# EAGLE board 13573_SparkFun_Roshamglo-panel.v10 (EAGLE 7.5.0), part 1 of 2
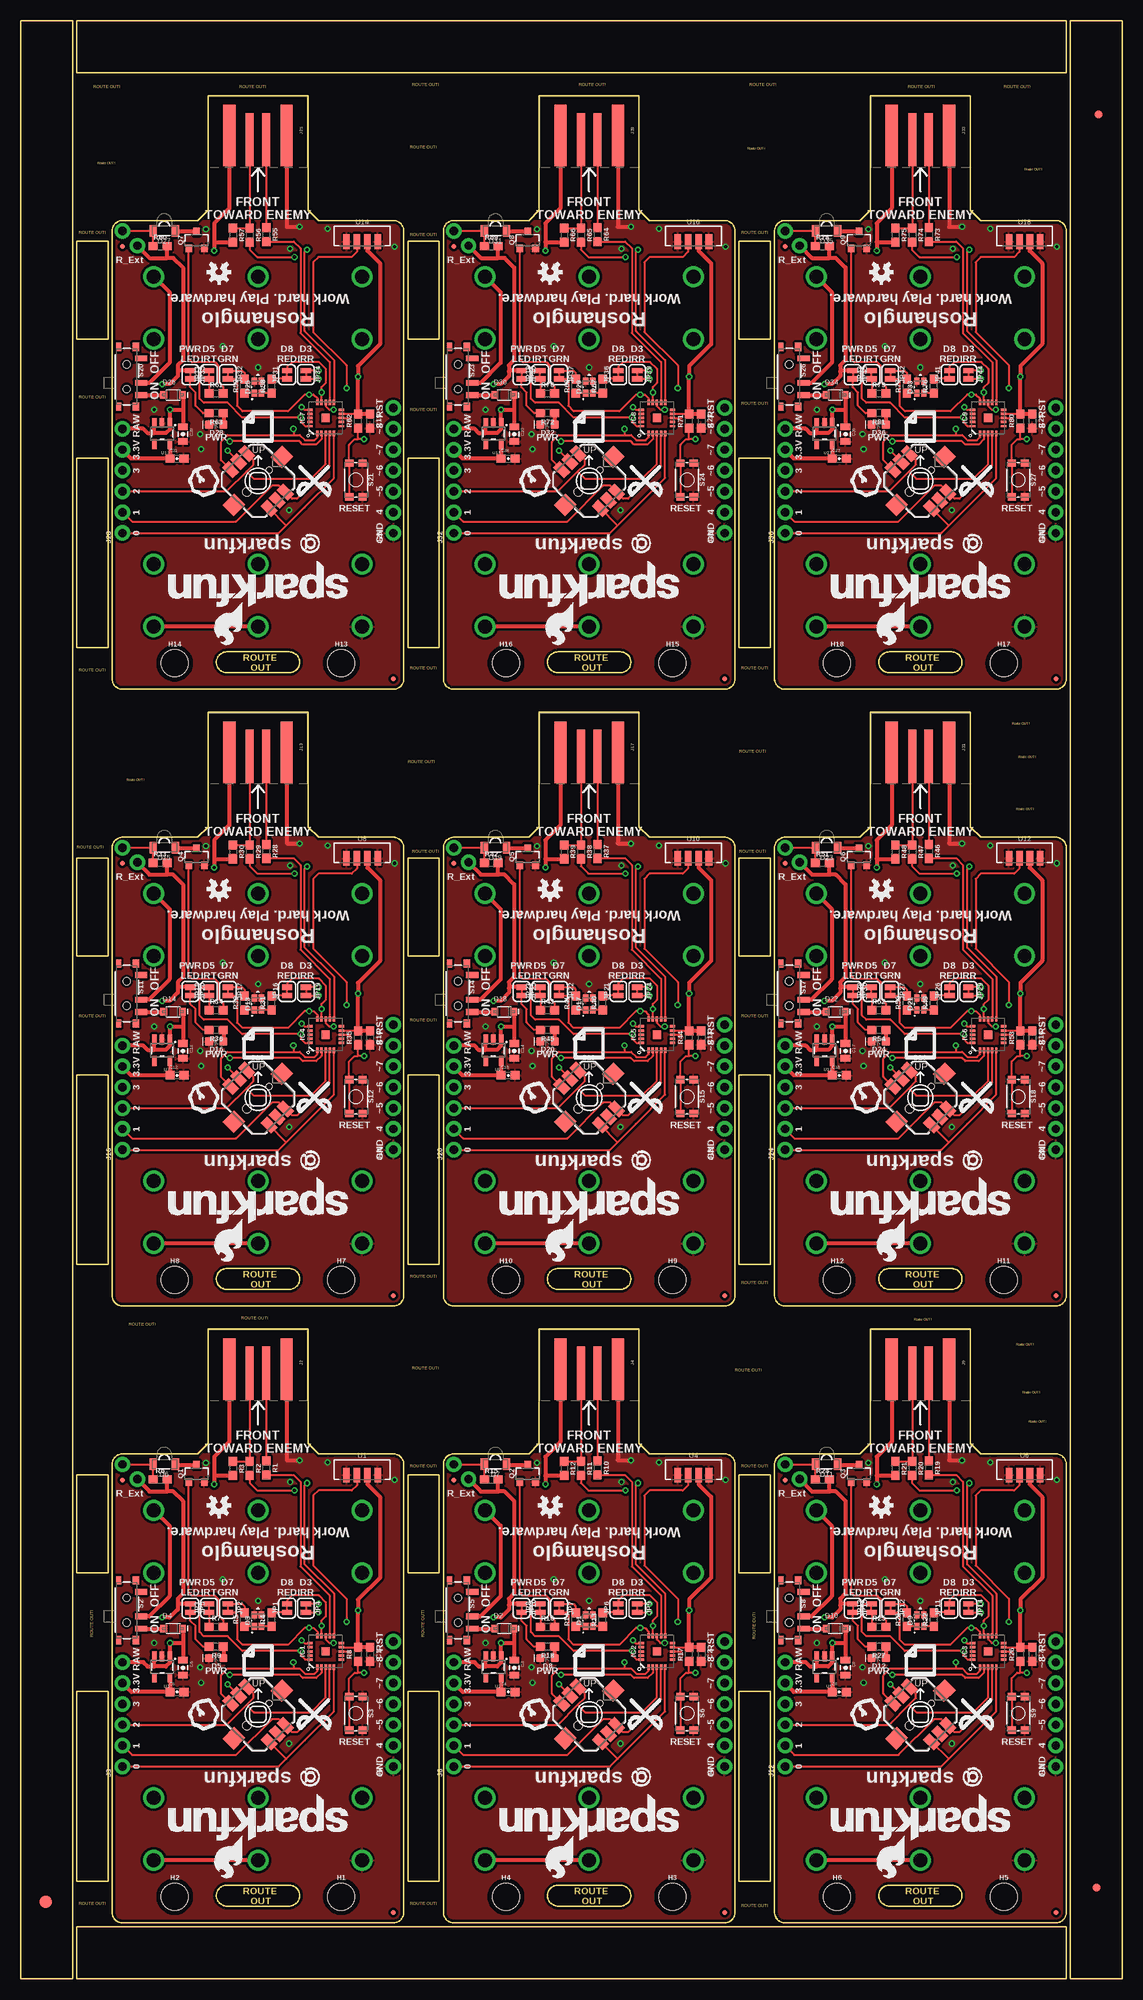
[diagram p0: board, top side]
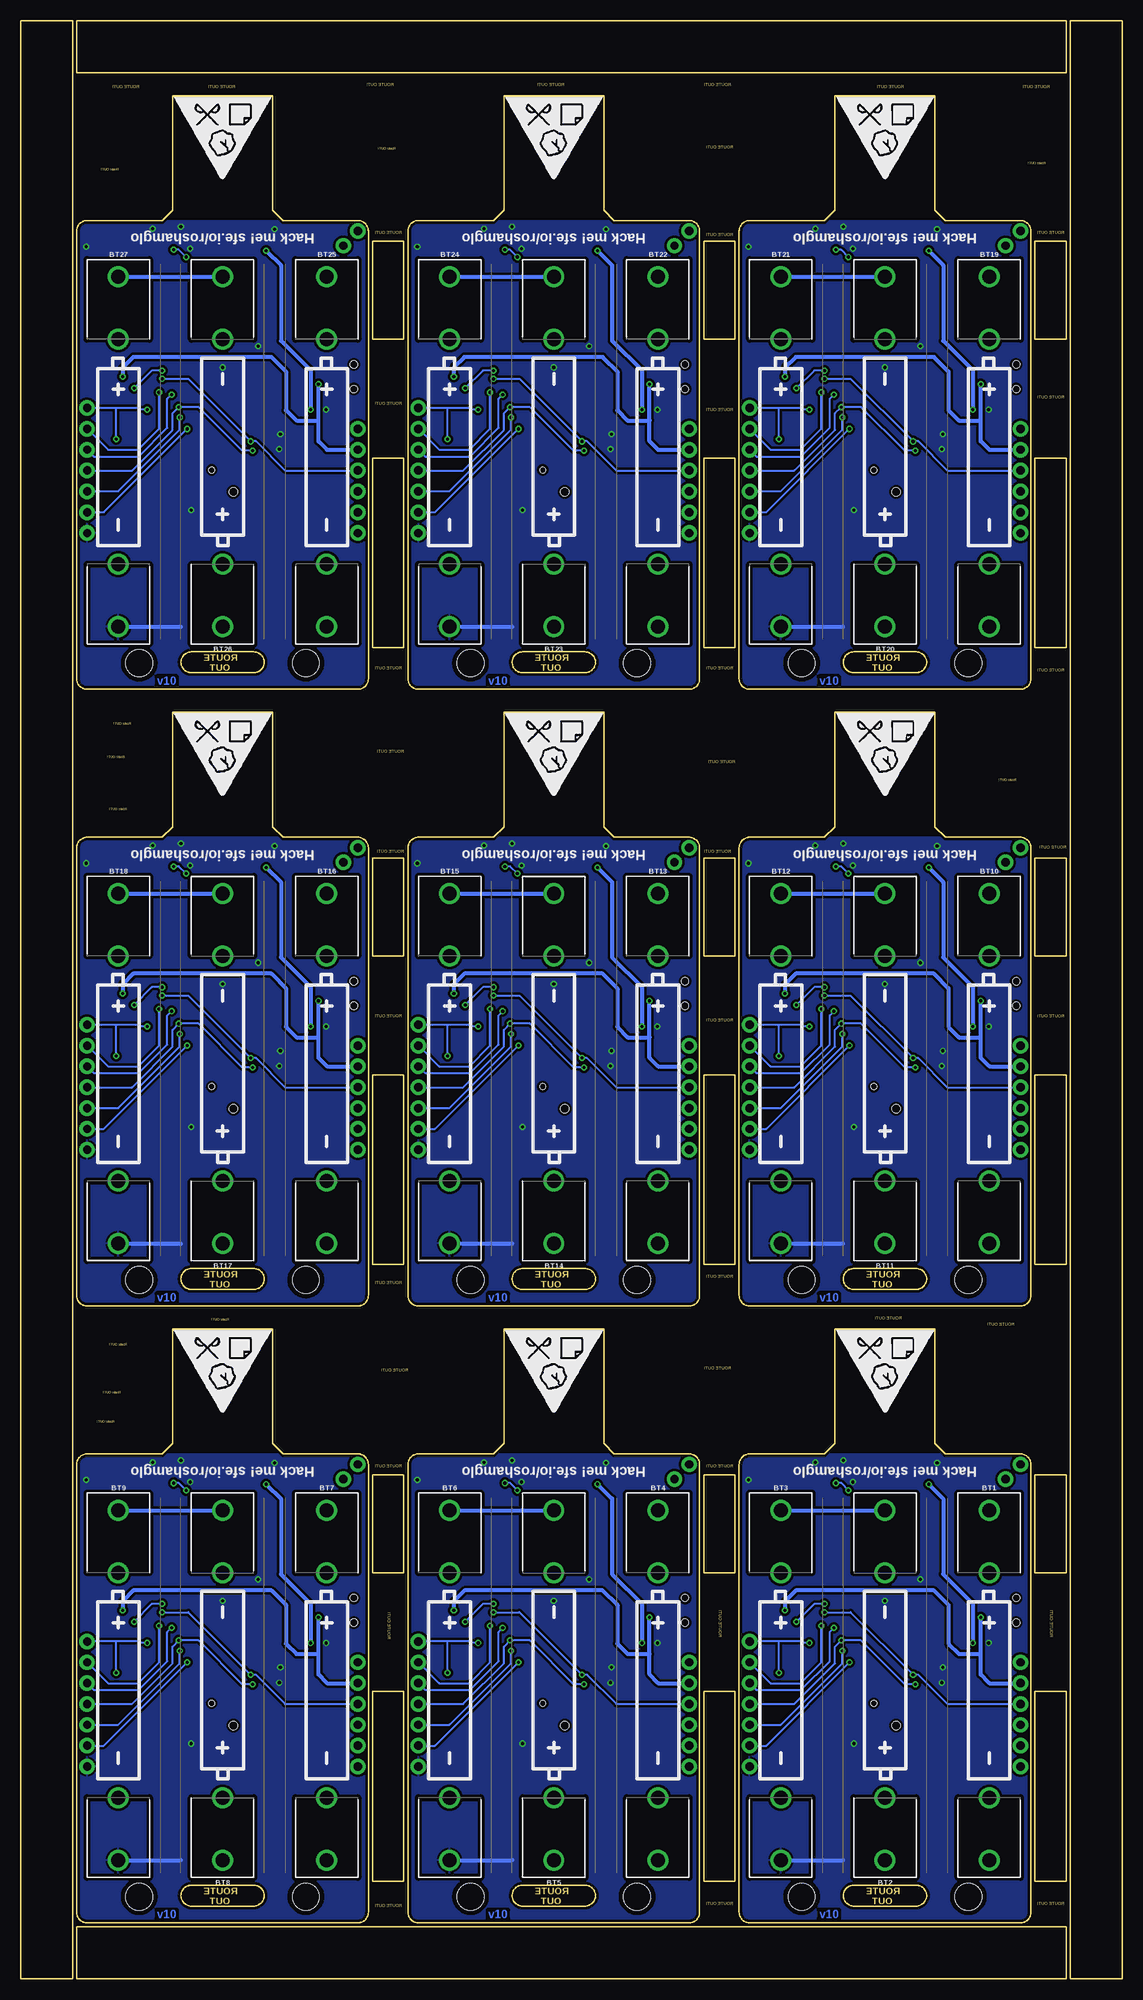
[diagram p1: board, bottom side, seen from below]

Size 134.37 x 238.76 mm. Coordinates in mm from the lower left corner, seen from the top.
Outline: 6.35,79.25 6.35,0 0,0 0,29.72
Outline: 0,27.18 0,238.76 6.35,238.76 6.35,76.71
Outline: 79.25,0 6.86,0 6.86,6.35 29.72,6.35
Outline: 27.18,6.35 127.51,6.35 127.51,0 76.71,0
Outline: 134.37,214.12 134.37,0 128.02,0 128.02,164.59
Outline: 128.02,162.05 128.02,238.76 134.37,238.76 134.37,211.58
Outline: 55.12,238.76 127.51,238.76 127.51,232.41 104.65,232.41
Outline: 107.19,232.41 6.86,232.41 6.86,238.76 57.66,238.76
Outline: 10.67,11.94 10.67,35.05 6.86,35.05 6.86,11.94 10.67,11.94
Outline: 10.67,49.53 10.67,61.47 6.86,61.47 6.86,49.53 10.67,49.53
Outline: 51.05,11.94 51.05,35.05 47.24,35.05 47.24,11.94 51.05,11.94
Outline: 51.05,49.53 51.05,61.47 47.24,61.47 47.24,49.53 51.05,49.53
Outline: 91.44,11.94 91.44,35.05 87.63,35.05 87.63,11.94 91.44,11.94
Outline: 91.44,49.53 91.44,61.47 87.63,61.47 87.63,49.53 91.44,49.53
Outline: 10.67,87.12 10.67,110.24 6.86,110.24 6.86,87.12 10.67,87.12
Outline: 10.67,124.71 10.67,136.65 6.86,136.65 6.86,124.71 10.67,124.71
Outline: 51.05,87.12 51.05,110.24 47.24,110.24 47.24,87.12 51.05,87.12
Outline: 51.05,124.71 51.05,136.65 47.24,136.65 47.24,124.71 51.05,124.71
Outline: 91.44,87.12 91.44,110.24 87.63,110.24 87.63,87.12 91.44,87.12
Outline: 91.44,124.71 91.44,136.65 87.63,136.65 87.63,124.71 91.44,124.71
Outline: 10.67,162.31 10.67,185.42 6.86,185.42 6.86,162.31 10.67,162.31
Outline: 10.67,199.9 10.67,211.84 6.86,211.84 6.86,199.9 10.67,199.9
Outline: 51.05,162.31 51.05,185.42 47.24,185.42 47.24,162.31 51.05,162.31
Outline: 51.05,199.9 51.05,211.84 47.24,211.84 47.24,199.9 51.05,199.9
Outline: 91.44,162.31 91.44,185.42 87.63,185.42 87.63,162.31 91.44,162.31
Outline: 91.44,199.9 91.44,211.84 87.63,211.84 87.63,199.9 91.44,199.9
Outline: 11.18,62.74 11.18,8.13 arc90 12.45,6.86 45.47,6.86 arc90 46.74,8.13 46.74,62.74 arc90 45.47,64.01 36.32,64.01 35.05,65.28 35.05,79.25 22.86,79.25 22.86,65.28 21.59,64.01 12.45,64.01 arc90 11.18,62.74
Outline: 32.77,8.89 25.15,8.89 arc-90 23.88,10.16 arc-90 25.15,11.43 32.77,11.43 arc-90 34.04,10.16 arc-90 32.77,8.89
Outline: 51.56,62.74 51.56,8.13 arc90 52.83,6.86 85.85,6.86 arc90 87.12,8.13 87.12,62.74 arc90 85.85,64.01 76.71,64.01 75.44,65.28 75.44,79.25 63.25,79.25 63.25,65.28 61.98,64.01 52.83,64.01 arc90 51.56,62.74
Outline: 73.15,8.89 65.53,8.89 arc-90 64.26,10.16 arc-90 65.53,11.43 73.15,11.43 arc-90 74.42,10.16 arc-90 73.15,8.89
Outline: 91.95,62.74 91.95,8.13 arc90 93.22,6.86 126.24,6.86 arc90 127.51,8.13 127.51,62.74 arc90 126.24,64.01 117.09,64.01 115.82,65.28 115.82,79.25 103.63,79.25 103.63,65.28 102.36,64.01 93.22,64.01 arc90 91.95,62.74
Outline: 113.54,8.89 105.92,8.89 arc-90 104.65,10.16 arc-90 105.92,11.43 113.54,11.43 arc-90 114.81,10.16 arc-90 113.54,8.89
Outline: 11.18,137.92 11.18,83.31 arc90 12.45,82.04 45.47,82.04 arc90 46.74,83.31 46.74,137.92 arc90 45.47,139.19 36.32,139.19 35.05,140.46 35.05,154.43 22.86,154.43 22.86,140.46 21.59,139.19 12.45,139.19 arc90 11.18,137.92
Outline: 32.77,84.07 25.15,84.07 arc-90 23.88,85.34 arc-90 25.15,86.61 32.77,86.61 arc-90 34.04,85.34 arc-90 32.77,84.07
Outline: 51.56,137.92 51.56,83.31 arc90 52.83,82.04 85.85,82.04 arc90 87.12,83.31 87.12,137.92 arc90 85.85,139.19 76.71,139.19 75.44,140.46 75.44,154.43 63.25,154.43 63.25,140.46 61.98,139.19 52.83,139.19 arc90 51.56,137.92
Outline: 73.15,84.07 65.53,84.07 arc-90 64.26,85.34 arc-90 65.53,86.61 73.15,86.61 arc-90 74.42,85.34 arc-90 73.15,84.07
Outline: 91.95,137.92 91.95,83.31 arc90 93.22,82.04 126.24,82.04 arc90 127.51,83.31 127.51,137.92 arc90 126.24,139.19 117.09,139.19 115.82,140.46 115.82,154.43 103.63,154.43 103.63,140.46 102.36,139.19 93.22,139.19 arc90 91.95,137.92
Outline: 113.54,84.07 105.92,84.07 arc-90 104.65,85.34 arc-90 105.92,86.61 113.54,86.61 arc-90 114.81,85.34 arc-90 113.54,84.07
Outline: 11.18,213.11 11.18,158.5 arc90 12.45,157.23 45.47,157.23 arc90 46.74,158.5 46.74,213.11 arc90 45.47,214.38 36.32,214.38 35.05,215.65 35.05,229.62 22.86,229.62 22.86,215.65 21.59,214.38 12.45,214.38 arc90 11.18,213.11
Outline: 32.77,159.26 25.15,159.26 arc-90 23.88,160.53 arc-90 25.15,161.8 32.77,161.8 arc-90 34.04,160.53 arc-90 32.77,159.26
Outline: 51.56,213.11 51.56,158.5 arc90 52.83,157.23 85.85,157.23 arc90 87.12,158.5 87.12,213.11 arc90 85.85,214.38 76.71,214.38 75.44,215.65 75.44,229.62 63.25,229.62 63.25,215.65 61.98,214.38 52.83,214.38 arc90 51.56,213.11
Outline: 73.15,159.26 65.53,159.26 arc-90 64.26,160.53 arc-90 65.53,161.8 73.15,161.8 arc-90 74.42,160.53 arc-90 73.15,159.26
Outline: 91.95,213.11 91.95,158.5 arc90 93.22,157.23 126.24,157.23 arc90 127.51,158.5 127.51,213.11 arc90 126.24,214.38 117.09,214.38 115.82,215.65 115.82,229.62 103.63,229.62 103.63,215.65 102.36,214.38 93.22,214.38 arc90 91.95,213.11
Outline: 113.54,159.26 105.92,159.26 arc-90 104.65,160.53 arc-90 105.92,161.8 113.54,161.8 arc-90 114.81,160.53 arc-90 113.54,159.26
Copper layers (1*16): Top 0.035mm / dielectric 1.5mm / Bottom 0.035mm
Design rules "SparkFun-2-layer-TIGHT": minimum track width 7mil, minimum drill 15mil, track to track 7mil, track to pad 7mil, pad to pad 7mil, via to via 7mil, smd to smd 7mil, copper to edge 7mil, drill to drill 7mil, minimum pad ring 7mil, minimum via ring 7mil, stop-mask expansion 4mil, vias tented up to drill 25mil, thermal gap 10mil

## Footprints (pad centres in the part's own frame; a part is rotated, then mirrored left to right if it is on the bottom)
BATTERY-AAA-KIT = drill 1.702: GND@1 21.336,0; GND@2 13.716,0; PWR@1 -21.336,0; PWR@2 -13.716,0
0603 = smd 1.1 x 1: 1 -0.85,0; 2 0.85,0
0805-CAP = smd 0.8 x 1.2: 1 -0.9,0; 2 0.9,0
0603-CAP = smd 1.1 x 1: 1 -0.85,0; 2 0.85,0
LTST-C195KGJRKT = smd 0.85 x 0.65: P$1 -0.725,0.425; P$2 -0.725,-0.425; P$3 0.725,0.425; P$4 0.725,-0.425
SOD-323 = smd 0.8 x 0.9: A -1.15,0; C 1.15,0
LED-0603 = smd 1 x 1: A -0.877,0; C 0.877,0
SFH4045N = smd 0.9 x 1.4: 1 -1.35,0; 2 1.35,0
FIDUCIAL-1.5X3 = smd 1.5 x 1.5: 1 0,0
FIDUCIAL-1X2 = smd 1 x 1: 1 0,0
FIDUCIAL-MICRO = smd 0.635 x 0.635: 1 0,0
STAND-OFF = hole 3.302: 0,0
QFN20 = smd 1 x 1: 0 0,0 | smd 0.65 x 0.3: 1 -1.9,1; 2 -1.9,0.5; 3 -1.9,0; 4 -1.9,-0.5; 5 -1.9,-1; 11 1.9,-1; 12 1.9,-0.5; 13 1.9,0; 14 1.9,0.5; 15 1.9,1 | smd 0.3 x 0.65: 6 -1,-1.9; 7 -0.5,-1.9; 8 0,-1.9; 9 0.5,-1.9; 10 1,-1.9; 16 1,1.9; 17 0.5,1.9; 18 0,1.9; 19 -0.5,1.9; 20 -1,1.9
1X02_NO_SILK = drill 1.016 pad 1.88: 1 0,0; 2 2.54,0
USB-A-PCB-NOPASTE = smd 7.5 x 1.5: 5V -0.2,-3.5; GND -0.2,3.5 | smd 6.5 x 1: USB_M 0.3,-1; USB_P 0.3,1
1X06_NO_SILK = drill 1.016 pad 1.88: 1 0,0; 2 2.54,0; 3 5.08,0; 4 7.62,0; 5 10.16,0; 6 12.7,0
1X07_NO_SILK = drill 1.016 pad 1.88: 1 0,0; 2 2.54,0; 3 5.08,0; 4 7.62,0; 5 10.16,0; 6 12.7,0; 7 15.24,0
SMT-JUMPER_2_NC_TRACE_SILK = smd 0.635 x 1.27: 1 -0.508,0; 2 0.508,0
SOT23-3 = smd 0.8 x 0.9: 1 -0.95,-1; 2 0.95,-1; 3 0,1.1
JOYSTICK_MINI = smd 1.85 x 1.1: A -3.325,1.4; B 3.325,1.4; C -3.325,-1.4; CTR -3.325,0; D 3.325,-1.4; GND 3.325,0 | smd 1.9 x 2: NC 0,4.13; NC@0 0,-4.13 | hole 0.75: 0,1.9 | hole 1.05: 0,-1.9
SWITCH_SPST_SMD_A = smd 0.7 x 1.5: 1 -2.25,-1.75; 2 -0.75,-1.75; 3 2.25,-1.75 | smd 1 x 0.6: GND1 -3.65,1; GND3 3.65,1 | smd 1 x 0.8: GND2 -3.65,-1.1; GND4 3.65,-1.1 | hole 0.9: -1.5,0; 1.5,0
TACTILE_SWITCH_SMD_4.6X2.8MM = smd 0.9 x 1: 1 -2.05,-0.8; 2 2.05,-0.8; 3 2.05,0.8; 4 -2.05,0.8
TSOP75XXXWTR = smd 0.8 x 1.8: 1 1.905,-1.3; 2 0.635,-1.3; 3 -0.635,-1.3; 4 -1.905,-1.3
SOT23-5 = smd 0.55 x 1.2: 1 -0.95,-1.3; 2 0,-1.3; 3 0.95,-1.3; 4 0.95,1.3; 5 -0.95,1.3

## Placement (x,y rotation side)
BT1  1.2V  [BATTERY-AAA-KIT]  16.26,35.81 270 bottom
BT2  1.2V  [BATTERY-AAA-KIT]  28.96,35.81 90 bottom
BT3  1.2V  [BATTERY-AAA-KIT]  41.66,35.81 270 bottom
BT4  1.2V  [BATTERY-AAA-KIT]  56.64,35.81 270 bottom
BT5  1.2V  [BATTERY-AAA-KIT]  69.34,35.81 90 bottom
BT6  1.2V  [BATTERY-AAA-KIT]  82.04,35.81 270 bottom
BT7  1.2V  [BATTERY-AAA-KIT]  97.03,35.81 270 bottom
BT8  1.2V  [BATTERY-AAA-KIT]  109.73,35.81 90 bottom
BT9  1.2V  [BATTERY-AAA-KIT]  122.43,35.81 270 bottom
BT10  1.2V  [BATTERY-AAA-KIT]  16.26,111 270 bottom
BT11  1.2V  [BATTERY-AAA-KIT]  28.96,111 90 bottom
BT12  1.2V  [BATTERY-AAA-KIT]  41.66,111 270 bottom
BT13  1.2V  [BATTERY-AAA-KIT]  56.64,111 270 bottom
BT14  1.2V  [BATTERY-AAA-KIT]  69.34,111 90 bottom
BT15  1.2V  [BATTERY-AAA-KIT]  82.04,111 270 bottom
BT16  1.2V  [BATTERY-AAA-KIT]  97.03,111 270 bottom
BT17  1.2V  [BATTERY-AAA-KIT]  109.73,111 90 bottom
BT18  1.2V  [BATTERY-AAA-KIT]  122.43,111 270 bottom
BT19  1.2V  [BATTERY-AAA-KIT]  16.26,186.18 270 bottom
BT20  1.2V  [BATTERY-AAA-KIT]  28.96,186.18 90 bottom
BT21  1.2V  [BATTERY-AAA-KIT]  41.66,186.18 270 bottom
BT22  1.2V  [BATTERY-AAA-KIT]  56.64,186.18 270 bottom
BT23  1.2V  [BATTERY-AAA-KIT]  69.34,186.18 90 bottom
BT24  1.2V  [BATTERY-AAA-KIT]  82.04,186.18 270 bottom
BT25  1.2V  [BATTERY-AAA-KIT]  97.03,186.18 270 bottom
BT26  1.2V  [BATTERY-AAA-KIT]  109.73,186.18 90 bottom
BT27  1.2V  [BATTERY-AAA-KIT]  122.43,186.18 270 bottom
C1  0.1uF  [0603]  42.61,39.56 270 top
C2  0.1uF  [0603]  82.99,39.56 270 top
C3  1.0uF  [0805-CAP]  60.2,37.96 270 top
C4  2.2uF  [0603-CAP]  59.46,34.99 0 top
C5  1.0uF  [0805-CAP]  19.81,37.96 270 top
C6  2.2uF  [0603-CAP]  19.08,34.99 0 top
C7  0.1uF  [0603]  123.38,39.56 270 top
C8  1.0uF  [0805-CAP]  100.58,37.96 270 top
C9  2.2uF  [0603-CAP]  99.85,34.99 0 top
C10  0.1uF  [0603]  42.61,114.74 270 top
C11  1.0uF  [0805-CAP]  19.81,113.14 270 top
C12  2.2uF  [0603-CAP]  19.08,110.17 0 top
C13  0.1uF  [0603]  82.99,114.74 270 top
C14  1.0uF  [0805-CAP]  60.2,113.14 270 top
C15  2.2uF  [0603-CAP]  59.46,110.17 0 top
C16  0.1uF  [0603]  123.38,114.74 270 top
C17  1.0uF  [0805-CAP]  100.58,113.14 270 top
C18  2.2uF  [0603-CAP]  99.85,110.17 0 top
C19  0.1uF  [0603]  42.61,189.93 270 top
C20  1.0uF  [0805-CAP]  19.81,188.33 270 top
C21  2.2uF  [0603-CAP]  19.08,185.36 0 top
C22  0.1uF  [0603]  82.99,189.93 270 top
C23  1.0uF  [0805-CAP]  60.2,188.33 270 top
C24  2.2uF  [0603-CAP]  59.46,185.36 0 top
C25  0.1uF  [0603]  123.38,189.93 270 top
C26  1.0uF  [0805-CAP]  100.58,188.33 270 top
C27  2.2uF  [0603-CAP]  99.85,185.36 0 top
D1  RG LED  [LTST-C195KGJRKT]  69.34,43.69 90 top
D2  800mA/220mV  [SOD-323]  58.99,42.74 0 top
D3  RG LED  [LTST-C195KGJRKT]  28.96,43.69 90 top
D4  800mA/220mV  [SOD-323]  18.61,42.74 0 top
D5  RED  [LED-0603]  23.88,39.12 180 top
D6  LED-IR  [SFH4045N]  17.53,62.74 180 top
D7  LED-IR  [SFH4045N]  57.91,62.74 180 top
D8  RED  [LED-0603]  64.26,39.12 180 top
D9  RG LED  [LTST-C195KGJRKT]  109.73,43.69 90 top
D10  800mA/220mV  [SOD-323]  99.38,42.74 0 top
D11  LED-IR  [SFH4045N]  98.3,62.74 180 top
D12  RED  [LED-0603]  104.65,39.12 180 top
D13  RG LED  [LTST-C195KGJRKT]  28.96,118.87 90 top
D14  800mA/220mV  [SOD-323]  18.61,117.92 0 top
D15  LED-IR  [SFH4045N]  17.53,137.92 180 top
D16  RED  [LED-0603]  23.88,114.3 180 top
D17  RG LED  [LTST-C195KGJRKT]  69.34,118.87 90 top
D18  800mA/220mV  [SOD-323]  58.99,117.92 0 top
D19  LED-IR  [SFH4045N]  57.91,137.92 180 top
D20  RED  [LED-0603]  64.26,114.3 180 top
D21  RG LED  [LTST-C195KGJRKT]  109.73,118.87 90 top
D22  800mA/220mV  [SOD-323]  99.38,117.92 0 top
D23  LED-IR  [SFH4045N]  98.3,137.92 180 top
D24  RED  [LED-0603]  104.65,114.3 180 top
D25  RG LED  [LTST-C195KGJRKT]  28.96,194.06 90 top
D26  800mA/220mV  [SOD-323]  18.61,193.1 0 top
D27  LED-IR  [SFH4045N]  17.53,213.11 180 top
D28  RED  [LED-0603]  23.88,189.48 180 top
D29  RG LED  [LTST-C195KGJRKT]  69.34,194.06 90 top
D30  800mA/220mV  [SOD-323]  58.99,193.1 0 top
D31  LED-IR  [SFH4045N]  57.91,213.11 180 top
D32  RED  [LED-0603]  64.26,189.48 180 top
D33  RG LED  [LTST-C195KGJRKT]  109.73,194.06 90 top
D34  800mA/220mV  [SOD-323]  99.38,193.1 0 top
D35  LED-IR  [SFH4045N]  98.3,213.11 180 top
D36  RED  [LED-0603]  104.65,189.48 180 top
E$1  [FIDUCIAL-1.5X3]  3.05,9.4 0 top
E$5  [FIDUCIAL-1X2]  131.19,11.18 0 top
E$6  [FIDUCIAL-1X2]  131.44,227.33 180 top
FD1  FIDUCIALUFIDUCIAL  [FIDUCIAL-MICRO]  12.45,60.83 0 top
FD2  FIDUCIALUFIDUCIAL  [FIDUCIAL-MICRO]  45.47,8.13 0 top
FD3  FIDUCIALUFIDUCIAL  [FIDUCIAL-MICRO]  52.83,60.83 0 top
FD4  FIDUCIALUFIDUCIAL  [FIDUCIAL-MICRO]  85.85,8.13 0 top
FD5  FIDUCIALUFIDUCIAL  [FIDUCIAL-MICRO]  93.22,60.83 0 top
FD6  FIDUCIALUFIDUCIAL  [FIDUCIAL-MICRO]  126.24,8.13 0 top
FD7  FIDUCIALUFIDUCIAL  [FIDUCIAL-MICRO]  12.45,136.02 0 top
FD8  FIDUCIALUFIDUCIAL  [FIDUCIAL-MICRO]  45.47,83.31 0 top
FD9  FIDUCIALUFIDUCIAL  [FIDUCIAL-MICRO]  52.83,136.02 0 top
FD10  FIDUCIALUFIDUCIAL  [FIDUCIAL-MICRO]  85.85,83.31 0 top
FD11  FIDUCIALUFIDUCIAL  [FIDUCIAL-MICRO]  93.22,136.02 0 top
FD12  FIDUCIALUFIDUCIAL  [FIDUCIAL-MICRO]  126.24,83.31 0 top
FD13  FIDUCIALUFIDUCIAL  [FIDUCIAL-MICRO]  12.45,211.2 0 top
FD14  FIDUCIALUFIDUCIAL  [FIDUCIAL-MICRO]  45.47,158.5 0 top
FD15  FIDUCIALUFIDUCIAL  [FIDUCIAL-MICRO]  52.83,211.2 0 top
FD16  FIDUCIALUFIDUCIAL  [FIDUCIAL-MICRO]  85.85,158.5 0 top
FD17  FIDUCIALUFIDUCIAL  [FIDUCIAL-MICRO]  93.22,211.2 0 top
FD18  FIDUCIALUFIDUCIAL  [FIDUCIAL-MICRO]  126.24,158.5 0 top
H1  STAND-OFF  [STAND-OFF]  39.12,10.03 0 top
H2  STAND-OFF  [STAND-OFF]  18.8,10.03 0 top
H3  STAND-OFF  [STAND-OFF]  79.5,10.03 0 top
H4  STAND-OFF  [STAND-OFF]  59.18,10.03 0 top
H5  STAND-OFF  [STAND-OFF]  119.89,10.03 0 top
H6  STAND-OFF  [STAND-OFF]  99.57,10.03 0 top
H7  STAND-OFF  [STAND-OFF]  39.12,85.22 0 top
H8  STAND-OFF  [STAND-OFF]  18.8,85.22 0 top
H9  STAND-OFF  [STAND-OFF]  79.5,85.22 0 top
H10  STAND-OFF  [STAND-OFF]  59.18,85.22 0 top
H11  STAND-OFF  [STAND-OFF]  119.89,85.22 0 top
H12  STAND-OFF  [STAND-OFF]  99.57,85.22 0 top
H13  STAND-OFF  [STAND-OFF]  39.12,160.4 0 top
H14  STAND-OFF  [STAND-OFF]  18.8,160.4 0 top
H15  STAND-OFF  [STAND-OFF]  79.5,160.4 0 top
H16  STAND-OFF  [STAND-OFF]  59.18,160.4 0 top
H17  STAND-OFF  [STAND-OFF]  119.89,160.4 0 top
H18  STAND-OFF  [STAND-OFF]  99.57,160.4 0 top
IC1  ATTINY84A  [QFN20]  37.21,39.94 90 top
IC2  ATTINY84A  [QFN20]  77.6,39.94 90 top
IC3  ATTINY84A  [QFN20]  117.98,39.94 90 top
IC4  ATTINY84A  [QFN20]  37.21,115.13 90 top
IC5  ATTINY84A  [QFN20]  77.6,115.13 90 top
IC6  ATTINY84A  [QFN20]  117.98,115.13 90 top
IC7  ATTINY84A  [QFN20]  37.21,190.31 90 top
IC8  ATTINY84A  [QFN20]  77.6,190.31 90 top
IC9  ATTINY84A  [QFN20]  117.98,190.31 90 top
J1  R_Ext  [1X02_NO_SILK]  12.45,62.74 315 top
J2  USBPCB  [USB-A-PCB-NOPASTE]  28.96,74.17 270 top
J3  [1X06_NO_SILK]  12.45,25.91 90 top
J4  USBPCB  [USB-A-PCB-NOPASTE]  69.34,74.17 270 top
J5  [1X07_NO_SILK]  45.47,25.91 90 top
J6  [1X07_NO_SILK]  85.85,25.91 90 top
J7  R_Ext  [1X02_NO_SILK]  52.83,62.74 315 top
J8  [1X06_NO_SILK]  52.83,25.91 90 top
J9  USBPCB  [USB-A-PCB-NOPASTE]  109.73,74.17 270 top
J10  [1X07_NO_SILK]  126.24,25.91 90 top
J11  R_Ext  [1X02_NO_SILK]  93.22,62.74 315 top
J12  [1X06_NO_SILK]  93.22,25.91 90 top
J13  USBPCB  [USB-A-PCB-NOPASTE]  28.96,149.35 270 top
J14  [1X07_NO_SILK]  45.47,101.09 90 top
J15  R_Ext  [1X02_NO_SILK]  12.45,137.92 315 top
J16  [1X06_NO_SILK]  12.45,101.09 90 top
J17  USBPCB  [USB-A-PCB-NOPASTE]  69.34,149.35 270 top
J18  [1X07_NO_SILK]  85.85,101.09 90 top
J19  R_Ext  [1X02_NO_SILK]  52.83,137.92 315 top
J20  [1X06_NO_SILK]  52.83,101.09 90 top
J21  USBPCB  [USB-A-PCB-NOPASTE]  109.73,149.35 270 top
J22  [1X07_NO_SILK]  126.24,101.09 90 top
J23  R_Ext  [1X02_NO_SILK]  93.22,137.92 315 top
J24  [1X06_NO_SILK]  93.22,101.09 90 top
J25  USBPCB  [USB-A-PCB-NOPASTE]  28.96,224.54 270 top
J26  [1X07_NO_SILK]  45.47,176.28 90 top
J27  R_Ext  [1X02_NO_SILK]  12.45,213.11 315 top
J28  [1X06_NO_SILK]  12.45,176.28 90 top
J29  USBPCB  [USB-A-PCB-NOPASTE]  69.34,224.54 270 top
J30  [1X07_NO_SILK]  85.85,176.28 90 top
J31  R_Ext  [1X02_NO_SILK]  52.83,213.11 315 top
J32  [1X06_NO_SILK]  52.83,176.28 90 top
J33  USBPCB  [USB-A-PCB-NOPASTE]  109.73,224.54 270 top
J34  [1X07_NO_SILK]  126.24,176.28 90 top
J35  R_Ext  [1X02_NO_SILK]  93.22,213.11 315 top
J36  [1X06_NO_SILK]  93.22,176.28 90 top
JP1  [SMT-JUMPER_2_NC_TRACE_SILK]  32.51,45.21 90 top
JP2  [SMT-JUMPER_2_NC_TRACE_SILK]  25.27,45.21 270 top
JP3  [SMT-JUMPER_2_NC_TRACE_SILK]  22.99,45.21 90 top
JP4  [SMT-JUMPER_2_NC_TRACE_SILK]  34.8,45.21 270 top
JP5  [SMT-JUMPER_2_NC_TRACE_SILK]  20.7,45.21 270 top
JP6  [SMT-JUMPER_2_NC_TRACE_SILK]  72.9,45.21 90 top
JP7  [SMT-JUMPER_2_NC_TRACE_SILK]  65.66,45.21 270 top
JP8  [SMT-JUMPER_2_NC_TRACE_SILK]  63.37,45.21 90 top
JP9  [SMT-JUMPER_2_NC_TRACE_SILK]  75.18,45.21 270 top
JP10  [SMT-JUMPER_2_NC_TRACE_SILK]  61.09,45.21 270 top
JP11  [SMT-JUMPER_2_NC_TRACE_SILK]  113.28,45.21 90 top
JP12  [SMT-JUMPER_2_NC_TRACE_SILK]  106.05,45.21 270 top
JP13  [SMT-JUMPER_2_NC_TRACE_SILK]  103.76,45.21 90 top
JP14  [SMT-JUMPER_2_NC_TRACE_SILK]  115.57,45.21 270 top
JP15  [SMT-JUMPER_2_NC_TRACE_SILK]  101.47,45.21 270 top
JP16  [SMT-JUMPER_2_NC_TRACE_SILK]  32.51,120.4 90 top
JP17  [SMT-JUMPER_2_NC_TRACE_SILK]  25.27,120.4 270 top
JP18  [SMT-JUMPER_2_NC_TRACE_SILK]  22.99,120.4 90 top
JP19  [SMT-JUMPER_2_NC_TRACE_SILK]  34.8,120.4 270 top
JP20  [SMT-JUMPER_2_NC_TRACE_SILK]  20.7,120.4 270 top
JP21  [SMT-JUMPER_2_NC_TRACE_SILK]  72.9,120.4 90 top
JP22  [SMT-JUMPER_2_NC_TRACE_SILK]  65.66,120.4 270 top
JP23  [SMT-JUMPER_2_NC_TRACE_SILK]  63.37,120.4 90 top
JP24  [SMT-JUMPER_2_NC_TRACE_SILK]  75.18,120.4 270 top
JP25  [SMT-JUMPER_2_NC_TRACE_SILK]  61.09,120.4 270 top
JP26  [SMT-JUMPER_2_NC_TRACE_SILK]  113.28,120.4 90 top
JP27  [SMT-JUMPER_2_NC_TRACE_SILK]  106.05,120.4 270 top
JP28  [SMT-JUMPER_2_NC_TRACE_SILK]  103.76,120.4 90 top
JP29  [SMT-JUMPER_2_NC_TRACE_SILK]  115.57,120.4 270 top
JP30  [SMT-JUMPER_2_NC_TRACE_SILK]  101.47,120.4 270 top
JP31  [SMT-JUMPER_2_NC_TRACE_SILK]  32.51,195.58 90 top
JP32  [SMT-JUMPER_2_NC_TRACE_SILK]  25.27,195.58 270 top
JP33  [SMT-JUMPER_2_NC_TRACE_SILK]  22.99,195.58 90 top
JP34  [SMT-JUMPER_2_NC_TRACE_SILK]  34.8,195.58 270 top
JP35  [SMT-JUMPER_2_NC_TRACE_SILK]  20.7,195.58 270 top
JP36  [SMT-JUMPER_2_NC_TRACE_SILK]  72.9,195.58 90 top
JP37  [SMT-JUMPER_2_NC_TRACE_SILK]  65.66,195.58 270 top
JP38  [SMT-JUMPER_2_NC_TRACE_SILK]  63.37,195.58 90 top
JP39  [SMT-JUMPER_2_NC_TRACE_SILK]  75.18,195.58 270 top
JP40  [SMT-JUMPER_2_NC_TRACE_SILK]  61.09,195.58 270 top
JP41  [SMT-JUMPER_2_NC_TRACE_SILK]  113.28,195.58 90 top
JP42  [SMT-JUMPER_2_NC_TRACE_SILK]  106.05,195.58 270 top
JP43  [SMT-JUMPER_2_NC_TRACE_SILK]  103.76,195.58 90 top
JP44  [SMT-JUMPER_2_NC_TRACE_SILK]  115.57,195.58 270 top
JP45  [SMT-JUMPER_2_NC_TRACE_SILK]  101.47,195.58 270 top
LOGO1  OSHW-LOGOS  [OSHW-LOGO-S]  24.19,57.72 180 top
LOGO2  SFE_LOGO_NAME_FLAME.2_INCH  [SFE_LOGO_NAME_FLAME_.2]  40.58,22.61 180 top
LOGO3  OSHW-LOGOS  [OSHW-LOGO-S]  64.58,57.72 180 top
LOGO4  SFE_LOGO_NAME_FLAME.2_INCH  [SFE_LOGO_NAME_FLAME_.2]  80.96,22.61 180 top
LOGO5  OSHW-LOGOS  [OSHW-LOGO-S]  104.97,57.72 180 top
LOGO6  SFE_LOGO_NAME_FLAME.2_INCH  [SFE_LOGO_NAME_FLAME_.2]  121.35,22.61 180 top
LOGO7  OSHW-LOGOS  [OSHW-LOGO-S]  24.19,132.91 180 top
LOGO8  SFE_LOGO_NAME_FLAME.2_INCH  [SFE_LOGO_NAME_FLAME_.2]  40.58,97.79 180 top
LOGO9  OSHW-LOGOS  [OSHW-LOGO-S]  64.58,132.91 180 top
LOGO10  SFE_LOGO_NAME_FLAME.2_INCH  [SFE_LOGO_NAME_FLAME_.2]  80.96,97.79 180 top
LOGO11  OSHW-LOGOS  [OSHW-LOGO-S]  104.97,132.91 180 top
LOGO12  SFE_LOGO_NAME_FLAME.2_INCH  [SFE_LOGO_NAME_FLAME_.2]  121.35,97.79 180 top
LOGO13  OSHW-LOGOS  [OSHW-LOGO-S]  24.19,208.09 180 top
LOGO14  SFE_LOGO_NAME_FLAME.2_INCH  [SFE_LOGO_NAME_FLAME_.2]  40.58,172.97 180 top
LOGO15  OSHW-LOGOS  [OSHW-LOGO-S]  64.58,208.09 180 top
LOGO16  SFE_LOGO_NAME_FLAME.2_INCH  [SFE_LOGO_NAME_FLAME_.2]  80.96,172.97 180 top
LOGO17  OSHW-LOGOS  [OSHW-LOGO-S]  104.97,208.09 180 top
LOGO18  SFE_LOGO_NAME_FLAME.2_INCH  [SFE_LOGO_NAME_FLAME_.2]  121.35,172.97 180 top
Q1  600mA/40V  [SOT23-3]  21.46,61.59 0 top
Q2  600mA/40V  [SOT23-3]  61.85,61.59 0 top
Q3  600mA/40V  [SOT23-3]  102.23,61.59 0 top
Q4  600mA/40V  [SOT23-3]  21.46,136.78 0 top
Q5  600mA/40V  [SOT23-3]  61.85,136.78 0 top
Q6  600mA/40V  [SOT23-3]  102.23,136.78 0 top
Q7  600mA/40V  [SOT23-3]  21.46,211.96 0 top
Q8  600mA/40V  [SOT23-3]  61.85,211.96 0 top
Q9  600mA/40V  [SOT23-3]  102.23,211.96 0 top
R1  68  [0603]  29.97,62.29 270 top
R2  68  [0603]  27.94,62.23 270 top
R3  1.5k  [0603]  25.91,62.23 270 top
R4  100  [0603]  30.61,43.81 90 top
R5  100  [0603]  27.3,43.81 90 top
R6  1.5k  [0603]  17.02,60.9 0 top
R7  1k  [0603]  23.88,42.93 0 top
R8  10k  [0603]  41.15,39.56 90 top
R9  1k  [0603]  23.88,40.51 180 top
R10  68  [0603]  70.36,62.29 270 top
R11  68  [0603]  68.33,62.23 270 top
R12  1.5k  [0603]  66.29,62.23 270 top
R13  100  [0603]  70.99,43.81 90 top
R14  100  [0603]  67.69,43.81 90 top
R15  1.5k  [0603]  57.4,60.9 0 top
R16  1k  [0603]  64.26,42.93 0 top
R17  10k  [0603]  81.53,39.56 90 top
R18  1k  [0603]  64.26,40.51 180 top
R19  68  [0603]  110.74,62.29 270 top
R20  68  [0603]  108.71,62.23 270 top
R21  1.5k  [0603]  106.68,62.23 270 top
R22  100  [0603]  111.38,43.81 90 top
R23  100  [0603]  108.08,43.81 90 top
R24  1.5k  [0603]  97.79,60.9 0 top
R25  1k  [0603]  104.65,42.93 0 top
R26  10k  [0603]  121.92,39.56 90 top
R27  1k  [0603]  104.65,40.51 180 top
R28  68  [0603]  29.97,137.48 270 top
R29  68  [0603]  27.94,137.41 270 top
R30  1.5k  [0603]  25.91,137.41 270 top
R31  100  [0603]  30.61,119 90 top
R32  100  [0603]  27.3,119 90 top
R33  1.5k  [0603]  17.02,136.08 0 top
R34  1k  [0603]  23.88,118.11 0 top
R35  10k  [0603]  41.15,114.74 90 top
R36  1k  [0603]  23.88,115.7 180 top
R37  68  [0603]  70.36,137.48 270 top
R38  68  [0603]  68.33,137.41 270 top
R39  1.5k  [0603]  66.29,137.41 270 top
R40  100  [0603]  70.99,119 90 top
R41  100  [0603]  67.69,119 90 top
R42  1.5k  [0603]  57.4,136.08 0 top
R43  1k  [0603]  64.26,118.11 0 top
R44  10k  [0603]  81.53,114.74 90 top
R45  1k  [0603]  64.26,115.7 180 top
R46  68  [0603]  110.74,137.48 270 top
R47  68  [0603]  108.71,137.41 270 top
R48  1.5k  [0603]  106.68,137.41 270 top
R49  100  [0603]  111.38,119 90 top
R50  100  [0603]  108.08,119 90 top
R51  1.5k  [0603]  97.79,136.08 0 top
R52  1k  [0603]  104.65,118.11 0 top
R53  10k  [0603]  121.92,114.74 90 top
R54  1k  [0603]  104.65,115.7 180 top
R55  68  [0603]  29.97,212.66 270 top
R56  68  [0603]  27.94,212.6 270 top
R57  1.5k  [0603]  25.91,212.6 270 top
R58  100  [0603]  30.61,194.18 90 top
R59  100  [0603]  27.3,194.18 90 top
R60  1.5k  [0603]  17.02,211.26 0 top
R61  1k  [0603]  23.88,193.29 0 top
R62  10k  [0603]  41.15,189.93 90 top
R63  1k  [0603]  23.88,190.88 180 top
R64  68  [0603]  70.36,212.66 270 top
R65  68  [0603]  68.33,212.6 270 top
R66  1.5k  [0603]  66.29,212.6 270 top
R67  100  [0603]  70.99,194.18 90 top
R68  100  [0603]  67.69,194.18 90 top
R69  1.5k  [0603]  57.4,211.26 0 top
R70  1k  [0603]  64.26,193.29 0 top
R71  10k  [0603]  81.53,189.93 90 top
R72  1k  [0603]  64.26,190.88 180 top
R73  68  [0603]  110.74,212.66 270 top
R74  68  [0603]  108.71,212.6 270 top
R75  1.5k  [0603]  106.68,212.6 270 top
R76  100  [0603]  111.38,194.18 90 top
R77  100  [0603]  108.08,194.18 90 top
R78  1.5k  [0603]  97.79,211.26 0 top
R79  1k  [0603]  104.65,193.29 0 top
R80  10k  [0603]  121.92,189.93 90 top
R81  1k  [0603]  104.65,190.88 180 top
S1  [JOYSTICK_MINI]  28.96,32.26 315 top
S2  [SWITCH_SPST_SMD_A]  12.95,44.96 90 top
S3  [TACTILE_SWITCH_SMD_4.6X2.8MM]  40.89,32.38 270 top
S4  [JOYSTICK_MINI]  69.34,32.26 315 top
S5  [SWITCH_SPST_SMD_A]  53.34,44.96 90 top
S6  [TACTILE_SWITCH_SMD_4.6X2.8MM]  81.28,32.38 270 top
S7  [JOYSTICK_MINI]  109.73,32.26 315 top
S8  [SWITCH_SPST_SMD_A]  93.73,44.96 90 top
S9  [TACTILE_SWITCH_SMD_4.6X2.8MM]  121.67,32.38 270 top
S10  [JOYSTICK_MINI]  28.96,107.44 315 top
S11  [SWITCH_SPST_SMD_A]  12.95,120.14 90 top
S12  [TACTILE_SWITCH_SMD_4.6X2.8MM]  40.89,107.57 270 top
S13  [JOYSTICK_MINI]  69.34,107.44 315 top
S14  [SWITCH_SPST_SMD_A]  53.34,120.14 90 top
S15  [TACTILE_SWITCH_SMD_4.6X2.8MM]  81.28,107.57 270 top
S16  [JOYSTICK_MINI]  109.73,107.44 315 top
S17  [SWITCH_SPST_SMD_A]  93.73,120.14 90 top
S18  [TACTILE_SWITCH_SMD_4.6X2.8MM]  121.67,107.57 270 top
S19  [JOYSTICK_MINI]  28.96,182.63 315 top
S20  [SWITCH_SPST_SMD_A]  12.95,195.33 90 top
S21  [TACTILE_SWITCH_SMD_4.6X2.8MM]  40.89,182.75 270 top
S22  [JOYSTICK_MINI]  69.34,182.63 315 top
S23  [SWITCH_SPST_SMD_A]  53.34,195.33 90 top
S24  [TACTILE_SWITCH_SMD_4.6X2.8MM]  81.28,182.75 270 top
S25  [JOYSTICK_MINI]  109.73,182.63 315 top
S26  [SWITCH_SPST_SMD_A]  93.73,195.33 90 top
S27  [TACTILE_SWITCH_SMD_4.6X2.8MM]  121.67,182.75 270 top
U1  IR-Receiver  [TSOP75XXXWTR]  41.66,62.74 0 top
U2  AP2112K-3.3V  [SOT23-5]  57.66,38.04 180 top
U3  AP2112K-3.3V  [SOT23-5]  17.27,38.04 180 top
U4  IR-Receiver  [TSOP75XXXWTR]  82.04,62.74 0 top
U5  AP2112K-3.3V  [SOT23-5]  98.04,38.04 180 top
U6  IR-Receiver  [TSOP75XXXWTR]  122.43,62.74 0 top
U7  AP2112K-3.3V  [SOT23-5]  17.27,113.22 180 top
U8  IR-Receiver  [TSOP75XXXWTR]  41.66,137.92 0 top
U9  AP2112K-3.3V  [SOT23-5]  57.66,113.22 180 top
U10  IR-Receiver  [TSOP75XXXWTR]  82.04,137.92 0 top
U11  AP2112K-3.3V  [SOT23-5]  98.04,113.22 180 top
U12  IR-Receiver  [TSOP75XXXWTR]  122.43,137.92 0 top
U13  AP2112K-3.3V  [SOT23-5]  17.27,188.4 180 top
U14  IR-Receiver  [TSOP75XXXWTR]  41.66,213.11 0 top
U15  AP2112K-3.3V  [SOT23-5]  57.66,188.4 180 top
U16  IR-Receiver  [TSOP75XXXWTR]  82.04,213.11 0 top
U17  AP2112K-3.3V  [SOT23-5]  98.04,188.4 180 top
U18  IR-Receiver  [TSOP75XXXWTR]  122.43,213.11 0 top
U$1  [ROSHAMGLO_PAPER]  28.96,38.86 0 top
U$2  [ROSHAMGLO_ROCK]  22.35,32.26 0 top
U$3  [ROSHAMGLO_SCISSORS]  35.81,32.26 0 top
U$4  [ROSHAMGLO_LOGO_0.4]  28.96,74.17 180 bottom
U$5  [ROSHAMGLO_PAPER]  69.34,38.86 0 top
U$6  [ROSHAMGLO_ROCK]  62.74,32.26 0 top
U$7  [ROSHAMGLO_SCISSORS]  76.2,32.26 0 top
U$8  [ROSHAMGLO_LOGO_0.4]  69.34,74.17 180 bottom
U$9  [ROSHAMGLO_PAPER]  109.73,38.86 0 top
U$10  [ROSHAMGLO_ROCK]  103.12,32.26 0 top
U$11  [ROSHAMGLO_SCISSORS]  116.59,32.26 0 top
U$12  [ROSHAMGLO_LOGO_0.4]  109.73,74.17 180 bottom
U$13  [ROSHAMGLO_PAPER]  28.96,114.05 0 top
U$14  [ROSHAMGLO_ROCK]  22.35,107.44 0 top
U$15  [ROSHAMGLO_SCISSORS]  35.81,107.44 0 top
U$16  [ROSHAMGLO_LOGO_0.4]  28.96,149.35 180 bottom
U$17  [ROSHAMGLO_PAPER]  69.34,114.05 0 top
U$18  [ROSHAMGLO_ROCK]  62.74,107.44 0 top
U$19  [ROSHAMGLO_SCISSORS]  76.2,107.44 0 top
U$20  [ROSHAMGLO_LOGO_0.4]  69.34,149.35 180 bottom
U$21  [ROSHAMGLO_PAPER]  109.73,114.05 0 top
U$22  [ROSHAMGLO_ROCK]  103.12,107.44 0 top
U$23  [ROSHAMGLO_SCISSORS]  116.59,107.44 0 top
U$24  [ROSHAMGLO_LOGO_0.4]  109.73,149.35 180 bottom
U$25  [ROSHAMGLO_PAPER]  28.96,189.23 0 top
U$26  [ROSHAMGLO_ROCK]  22.35,182.63 0 top
U$27  [ROSHAMGLO_SCISSORS]  35.81,182.63 0 top
U$28  [ROSHAMGLO_LOGO_0.4]  28.96,224.54 180 bottom
U$29  [ROSHAMGLO_PAPER]  69.34,189.23 0 top
U$30  [ROSHAMGLO_ROCK]  62.74,182.63 0 top
U$31  [ROSHAMGLO_SCISSORS]  76.2,182.63 0 top
U$32  [ROSHAMGLO_LOGO_0.4]  69.34,224.54 180 bottom
U$33  [ROSHAMGLO_PAPER]  109.73,189.23 0 top
U$34  [ROSHAMGLO_ROCK]  103.12,182.63 0 top
U$35  [ROSHAMGLO_SCISSORS]  116.59,182.63 0 top
U$36  [ROSHAMGLO_LOGO_0.4]  109.73,224.54 180 bottom

## Library data of the parts
BT1-BT27 = SparkFun-Batteries; PROD_ID: BATT-08571; SF_SKU: PRT-12718
C1 C2 C7 C10 C13 C16 C19 C22 C25 = SparkFun-Capacitors; PROD_ID: CAP-00810
C3 C5 C8 C11 C14 C17 C20 C23 C26 = SparkFun-Capacitors; PROD_ID: CAP-11625
C4 C6 C9 C12 C15 C18 C21 C24 C27 = SparkFun-Capacitors; PROD_ID: CAP-07888
D1 D3 D9 D13 D17 D21 D25 D29 D33 = SparkFun-LED; PROD_ID: DIO-12140
D2 D4 D10 D14 D18 D22 D26 D30 D34 = Roshamglo; PROD_ID: DIO-13570
D5 D8 D12 D16 D20 D24 D28 D32 D36 = SparkFun-LED; PROD_ID: DIO-00819
D6 D7 D11 D15 D19 D23 D27 D31 D35 = Roshamglo; PROD_ID: DIO-13574
E$1 = SparkFun-Retired
E$5 E$6 FD1-FD18 LOGO1-LOGO18 = SparkFun-Aesthetics
H1-H18 = SparkFun-Hardware
IC1-IC9 = SparkFun-IC-Microcontroller; PROD_ID: IC-13571
J1 J2 J4-J7 J9-J11 J13-J15 J17-J19 J21-J23 J25-J27 J29-J31 J33-J35 = SparkFun-Connectors
J3 J8 J12 J16 J20 J24 J28 J32 J36 = SparkFun-Connectors; PROD_ID: CONN-08437
JP1-JP45 = SparkFun-Jumpers
Q1-Q9 = SparkFun-DiscreteSemi; PROD_ID: TRANS-08049
R1 R2 R10 R11 R19 R20 R28 R29 R37 R38 R46 R47 R55 R56 R64 R65 R73 R74 = SparkFun-Resistors; PROD_ID: RES-07860
R3 R6 R12 R15 R21 R24 R30 R33 R39 R42 R48 R51 R57 R60 R66 R69 R75 R78 = SparkFun-Resistors; PROD_ID: RES-08306
R4 R5 R13 R14 R22 R23 R31 R32 R40 R41 R49 R50 R58 R59 R67 R68 R76 R77 = SparkFun-Resistors; PROD_ID: RES-07863
R7 R9 R16 R18 R25 R27 R34 R36 R43 R45 R52 R54 R61 R63 R70 R72 R79 R81 = SparkFun-Resistors; PROD_ID: RES-07856
R8 R17 R26 R35 R44 R53 R62 R71 R80 = SparkFun-Resistors; PROD_ID: RES-00824
S1 S4 S7 S10 S13 S16 S19 S22 S25 = SparkFun-Switches; PROD_ID: SWCH-09905; SF_SKU: COM-10063
S2 S5 S8 S11 S14 S17 S20 S23 S26 = SparkFun-Switches; PROD_ID: SWCH-10651; SF_SKU: COM-10860
S3 S6 S9 S12 S15 S18 S21 S24 S27 = SparkFun-Switches; PROD_ID: SWCH-13065
U1 U4 U6 U8 U10 U12 U14 U16 U18 = Roshamglo; PROD_ID: SEN-13572
U2 U3 U5 U7 U9 U11 U13 U15 U17 = SparkFun-PowerIC; PROD_ID: VREG-12457
U$1-U$36 = Roshamglo

## Nets
0: IC1.5 J3.1 S1.D
1: IC1.4 J3.2 S1.B
2: IC1.3 J3.3 S1.A
3: IC1.2 J3.4 JP4.2
3.3V: C1.1 C6.1 IC1.9 J1.2 J3.5 JP5.1 R6.2 R8.2 U1.2 U3.5
3.3V1: C2.1 C4.1 IC2.9 J7.2 J8.5 JP10.1 R15.2 R17.2 U2.5 U4.2
3.3V2: C7.1 C9.1 IC3.9 J11.2 J12.5 JP15.1 R24.2 R26.2 U5.5 U6.2
3.3V3: C10.1 C12.1 IC4.9 J15.2 J16.5 JP20.1 R33.2 R35.2 U7.5 U8.2
3.3V4: C13.1 C15.1 IC5.9 J19.2 J20.5 JP25.1 R42.2 R44.2 U9.5 U10.2
3.3V5: C16.1 C18.1 IC6.9 J23.2 J24.5 JP30.1 R51.2 R53.2 U11.5 U12.2
3.3V6: C19.1 C21.1 IC7.9 J27.2 J28.5 JP35.1 R60.2 R62.2 U13.5 U14.2
3.3V7: C22.1 C24.1 IC8.9 J31.2 J32.5 JP40.1 R69.2 R71.2 U15.5 U16.2
3.3V8: C25.1 C27.1 IC9.9 J35.2 J36.5 JP45.1 R78.2 R80.2 U17.5 U18.2
4: IC1.1 J5.2 S1.C
5: IC1.20 J5.3 JP3.2
6: IC1.16 J5.4 S1.CTR
7: IC1.15 J5.5 JP2.2
8: IC1.14 J5.6 JP1.2
9: IC1.12 R1.2
10: IC1.11 R2.2
11: IC2.14 J6.6 JP6.2
12: IC2.12 R10.2
13: IC2.11 R11.2
14: IC2.15 J6.5 JP7.2
15: IC2.16 J6.4 S4.CTR
16: IC2.20 J6.3 JP8.2
17: IC2.1 J6.2 S4.C
18: IC2.2 J8.4 JP9.2
19: IC2.3 J8.3 S4.A
20: IC2.4 J8.2 S4.B
21: IC2.5 J8.1 S4.D
22: IC3.14 J10.6 JP11.2
23: IC3.12 R19.2
24: IC3.11 R20.2
25: IC3.15 J10.5 JP12.2
26: IC3.16 J10.4 S7.CTR
27: IC3.20 J10.3 JP13.2
28: IC3.1 J10.2 S7.C
29: IC3.2 J12.4 JP14.2
30: IC3.3 J12.3 S7.A
31: IC3.4 J12.2 S7.B
32: IC3.5 J12.1 S7.D
33: IC4.14 J14.6 JP16.2
34: IC4.12 R28.2
35: IC4.11 R29.2
36: IC4.15 J14.5 JP17.2
37: IC4.16 J14.4 S10.CTR
38: IC4.20 J14.3 JP18.2
39: IC4.1 J14.2 S10.C
40: IC4.2 J16.4 JP19.2
41: IC4.3 J16.3 S10.A
42: IC4.4 J16.2 S10.B
43: IC4.5 J16.1 S10.D
44: IC5.14 J18.6 JP21.2
45: IC5.12 R37.2
46: IC5.11 R38.2
47: IC5.15 J18.5 JP22.2
48: IC5.16 J18.4 S13.CTR
49: IC5.20 J18.3 JP23.2
50: IC5.1 J18.2 S13.C
51: IC5.2 J20.4 JP24.2
52: IC5.3 J20.3 S13.A
53: IC5.4 J20.2 S13.B
54: IC5.5 J20.1 S13.D
55: IC6.14 J22.6 JP26.2
56: IC6.12 R46.2
57: IC6.11 R47.2
58: IC6.15 J22.5 JP27.2
59: IC6.16 J22.4 S16.CTR
60: IC6.20 J22.3 JP28.2
61: IC6.1 J22.2 S16.C
62: IC6.2 J24.4 JP29.2
63: IC6.3 J24.3 S16.A
64: IC6.4 J24.2 S16.B
65: IC6.5 J24.1 S16.D
66: IC7.14 J26.6 JP31.2
67: IC7.12 R55.2
68: IC7.11 R56.2
69: IC7.15 J26.5 JP32.2
70: IC7.16 J26.4 S19.CTR
71: IC7.20 J26.3 JP33.2
72: IC7.1 J26.2 S19.C
73: IC7.2 J28.4 JP34.2
74: IC7.3 J28.3 S19.A
75: IC7.4 J28.2 S19.B
76: IC7.5 J28.1 S19.D
77: IC8.14 J30.6 JP36.2
78: IC8.12 R64.2
79: IC8.11 R65.2
80: IC8.15 J30.5 JP37.2
81: IC8.16 J30.4 S22.CTR
82: IC8.20 J30.3 JP38.2
83: IC8.1 J30.2 S22.C
84: IC8.2 J32.4 JP39.2
85: IC8.3 J32.3 S22.A
86: IC8.4 J32.2 S22.B
87: IC8.5 J32.1 S22.D
88: IC9.14 J34.6 JP41.2
89: IC9.12 R73.2
90: IC9.11 R74.2
91: IC9.15 J34.5 JP42.2
92: IC9.16 J34.4 S25.CTR
93: IC9.20 J34.3 JP43.2
94: IC9.1 J34.2 S25.C
95: IC9.2 J36.4 JP44.2
96: IC9.3 J36.3 S25.A
97: IC9.4 J36.2 S25.B
98: IC9.5 J36.1 S25.D
!RESET: IC1.13 J5.7 R8.1 S3.1 S3.2
!RESET1: IC2.13 J6.7 R17.1 S6.1 S6.2
!RESET2: IC3.13 J10.7 R26.1 S9.1 S9.2
!RESET3: IC4.13 J14.7 R35.1 S12.1 S12.2
!RESET4: IC5.13 J18.7 R44.1 S15.1 S15.2
!RESET5: IC6.13 J22.7 R53.1 S18.1 S18.2
!RESET6: IC7.13 J26.7 R62.1 S21.1 S21.2
!RESET7: IC8.13 J30.7 R71.1 S24.1 S24.2
!RESET8: IC9.13 J34.7 R80.1 S27.1 S27.2
D+: J2.USB_P R1.1
D+1: J4.USB_P R10.1
D+2: J9.USB_P R19.1
D+3: J13.USB_P R28.1
D+4: J17.USB_P R37.1
D+5: J21.USB_P R46.1
D+6: J25.USB_P R55.1
D+7: J29.USB_P R64.1
D+8: J33.USB_P R73.1
D-: J2.USB_M R2.1 R3.1
D-1: J4.USB_M R11.1 R12.1
D-2: J9.USB_M R20.1 R21.1
D-3: J13.USB_M R29.1 R30.1
D-4: J17.USB_M R38.1 R39.1
D-5: J21.USB_M R47.1 R48.1
D-6: J25.USB_M R56.1 R57.1
D-7: J29.USB_M R65.1 R66.1
D-8: J33.USB_M R74.1 R75.1
GND: BT3.GND@1 C1.2 C5.2 C6.2 D3.P$3 D3.P$4 D5.C IC1.8 J2.GND J5.1 Q1.2 S1.GND S3.3 S3.4 U1.1 U1.4 U3.2
GND1: BT6.GND@1 C2.2 C3.2 C4.2 D1.P$3 D1.P$4 D8.C IC2.8 J4.GND J6.1 Q2.2 S4.GND S6.3 S6.4 U2.2 U4.1 U4.4
GND2: BT9.GND@1 C7.2 C8.2 C9.2 D9.P$3 D9.P$4 D12.C IC3.8 J9.GND J10.1 Q3.2 S7.GND S9.3 S9.4 U5.2 U6.1 U6.4
GND3: BT12.GND@1 C10.2 C11.2 C12.2 D13.P$3 D13.P$4 D16.C IC4.8 J13.GND J14.1 Q4.2 S10.GND S12.3 S12.4 U7.2 U8.1 U8.4
GND4: BT15.GND@1 C13.2 C14.2 C15.2 D17.P$3 D17.P$4 D20.C IC5.8 J17.GND J18.1 Q5.2 S13.GND S15.3 S15.4 U9.2 U10.1 U10.4
GND5: BT18.GND@1 C16.2 C17.2 C18.2 D21.P$3 D21.P$4 D24.C IC6.8 J21.GND J22.1 Q6.2 S16.GND S18.3 S18.4 U11.2 U12.1 U12.4
GND6: BT21.GND@1 C19.2 C20.2 C21.2 D25.P$3 D25.P$4 D28.C IC7.8 J25.GND J26.1 Q7.2 S19.GND S21.3 S21.4 U13.2 U14.1 U14.4
GND7: BT24.GND@1 C22.2 C23.2 C24.2 D29.P$3 D29.P$4 D32.C IC8.8 J29.GND J30.1 Q8.2 S22.GND S24.3 S24.4 U15.2 U16.1 U16.4
GND8: BT27.GND@1 C25.2 C26.2 C27.2 D33.P$3 D33.P$4 D36.C IC9.8 J33.GND J34.1 Q9.2 S25.GND S27.3 S27.4 U17.2 U18.1 U18.4
N$1: D5.A R9.1
N$2: D3.P$2 R4.1
N$3: D4.A S2.1
N$4: D3.P$1 R5.1
N$5: D6.1 Q1.3
N$6: Q1.1 R7.2
N$7: JP1.1 R4.2
N$8: JP2.1 R5.2
N$9: JP4.1 U1.3
N$10: JP3.1 R7.1
N$11: JP5.2 R9.2
N$12: BT1.GND@1 BT2.PWR@1
N$13: BT2.GND@1 BT3.PWR@1
N$14: D6.2 J1.1 R6.1
N$15: D1.P$2 R13.1
N$16: D1.P$1 R14.1
N$17: BT4.GND@1 BT5.PWR@1
N$18: BT5.GND@1 BT6.PWR@1
N$19: D2.A S5.1
N$20: JP6.1 R13.2
N$21: JP7.1 R14.2
N$22: D7.1 Q2.3
N$23: Q2.1 R16.2
N$24: JP9.1 U4.3
N$25: JP8.1 R16.1
N$26: D7.2 J7.1 R15.1
N$27: D8.A R18.1
N$28: JP10.2 R18.2
N$29: D9.P$2 R22.1
N$30: D9.P$1 R23.1
N$31: BT7.GND@1 BT8.PWR@1
N$32: BT8.GND@1 BT9.PWR@1
N$33: D10.A S8.1
N$34: JP11.1 R22.2
N$35: JP12.1 R23.2
N$36: D11.1 Q3.3
N$37: Q3.1 R25.2
N$38: JP14.1 U6.3
N$39: JP13.1 R25.1
N$40: D11.2 J11.1 R24.1
N$41: D12.A R27.1
N$42: JP15.2 R27.2
N$43: D13.P$2 R31.1
N$44: D13.P$1 R32.1
N$45: BT10.GND@1 BT11.PWR@1
N$46: BT11.GND@1 BT12.PWR@1
N$47: D14.A S11.1
N$48: JP16.1 R31.2
N$49: JP17.1 R32.2
N$50: D15.1 Q4.3
N$51: Q4.1 R34.2
N$52: JP19.1 U8.3
N$53: JP18.1 R34.1
N$54: D15.2 J15.1 R33.1
N$55: D16.A R36.1
N$56: JP20.2 R36.2
N$57: D17.P$2 R40.1
N$58: D17.P$1 R41.1
N$59: BT13.GND@1 BT14.PWR@1
N$60: BT14.GND@1 BT15.PWR@1
N$61: D18.A S14.1
N$62: JP21.1 R40.2
N$63: JP22.1 R41.2
N$64: D19.1 Q5.3
N$65: Q5.1 R43.2
N$66: JP24.1 U10.3
N$67: JP23.1 R43.1
N$68: D19.2 J19.1 R42.1
N$69: D20.A R45.1
N$70: JP25.2 R45.2
N$71: D21.P$2 R49.1
N$72: D21.P$1 R50.1
N$73: BT16.GND@1 BT17.PWR@1
N$74: BT17.GND@1 BT18.PWR@1
N$75: D22.A S17.1
N$76: JP26.1 R49.2
N$77: JP27.1 R50.2
N$78: D23.1 Q6.3
N$79: Q6.1 R52.2
N$80: JP29.1 U12.3
N$81: JP28.1 R52.1
N$82: D23.2 J23.1 R51.1
N$83: D24.A R54.1
N$84: JP30.2 R54.2
N$85: D25.P$2 R58.1
N$86: D25.P$1 R59.1
N$87: BT19.GND@1 BT20.PWR@1
N$88: BT20.GND@1 BT21.PWR@1
N$89: D26.A S20.1
N$90: JP31.1 R58.2
N$91: JP32.1 R59.2
N$92: D27.1 Q7.3
N$93: Q7.1 R61.2
N$94: JP34.1 U14.3
N$95: JP33.1 R61.1
N$96: D27.2 J27.1 R60.1
N$97: D28.A R63.1
N$98: JP35.2 R63.2
N$99: D29.P$2 R67.1
N$100: D29.P$1 R68.1
N$101: BT22.GND@1 BT23.PWR@1
N$102: BT23.GND@1 BT24.PWR@1
N$103: D30.A S23.1
N$104: JP36.1 R67.2
N$105: JP37.1 R68.2
N$106: D31.1 Q8.3
N$107: Q8.1 R70.2
N$108: JP39.1 U16.3
N$109: JP38.1 R70.1
N$110: D31.2 J31.1 R69.1
N$111: D32.A R72.1
N$112: JP40.2 R72.2
N$113: D33.P$2 R76.1
N$114: D33.P$1 R77.1
N$115: BT25.GND@1 BT26.PWR@1
N$116: BT26.GND@1 BT27.PWR@1
N$117: D34.A S26.1
N$118: JP41.1 R76.2
N$119: JP42.1 R77.2
N$120: D35.1 Q9.3
N$121: Q9.1 R79.2
N$122: JP44.1 U18.3
N$123: JP43.1 R79.1
N$124: D35.2 J35.1 R78.1
N$125: D36.A R81.1
N$126: JP45.2 R81.2
V_BATT: BT1.PWR@1 S2.2
V_BATT1: BT4.PWR@1 S5.2
V_BATT2: BT7.PWR@1 S8.2
V_BATT3: BT10.PWR@1 S11.2
V_BATT4: BT13.PWR@1 S14.2
V_BATT5: BT16.PWR@1 S17.2
V_BATT6: BT19.PWR@1 S20.2
V_BATT7: BT22.PWR@1 S23.2
V_BATT8: BT25.PWR@1 S26.2
VIN: C5.1 D4.C J2.5V J3.6 R3.2 U3.1 U3.3
VIN1: C3.1 D2.C J4.5V J8.6 R12.2 U2.1 U2.3
VIN2: C8.1 D10.C J9.5V J12.6 R21.2 U5.1 U5.3
VIN3: C11.1 D14.C J13.5V J16.6 R30.2 U7.1 U7.3
VIN4: C14.1 D18.C J17.5V J20.6 R39.2 U9.1 U9.3
VIN5: C17.1 D22.C J21.5V J24.6 R48.2 U11.1 U11.3
VIN6: C20.1 D26.C J25.5V J28.6 R57.2 U13.1 U13.3
VIN7: C23.1 D30.C J29.5V J32.6 R66.2 U15.1 U15.3
VIN8: C26.1 D34.C J33.5V J36.6 R75.2 U17.1 U17.3